# Altium PCB 主板-0909.PcbDoc (part 3 of 5)
Units mm, origin at the board's own origin, x right, y up, seen from the top; angles counter-clockwise.
Board outline 97.69 x 103.45 mm, 2 copper layers (Top Layer, Bottom Layer); 76 components, 70 nets, 245 pads, 271 vias.
Unrouted connection lines stored in the file: 5.
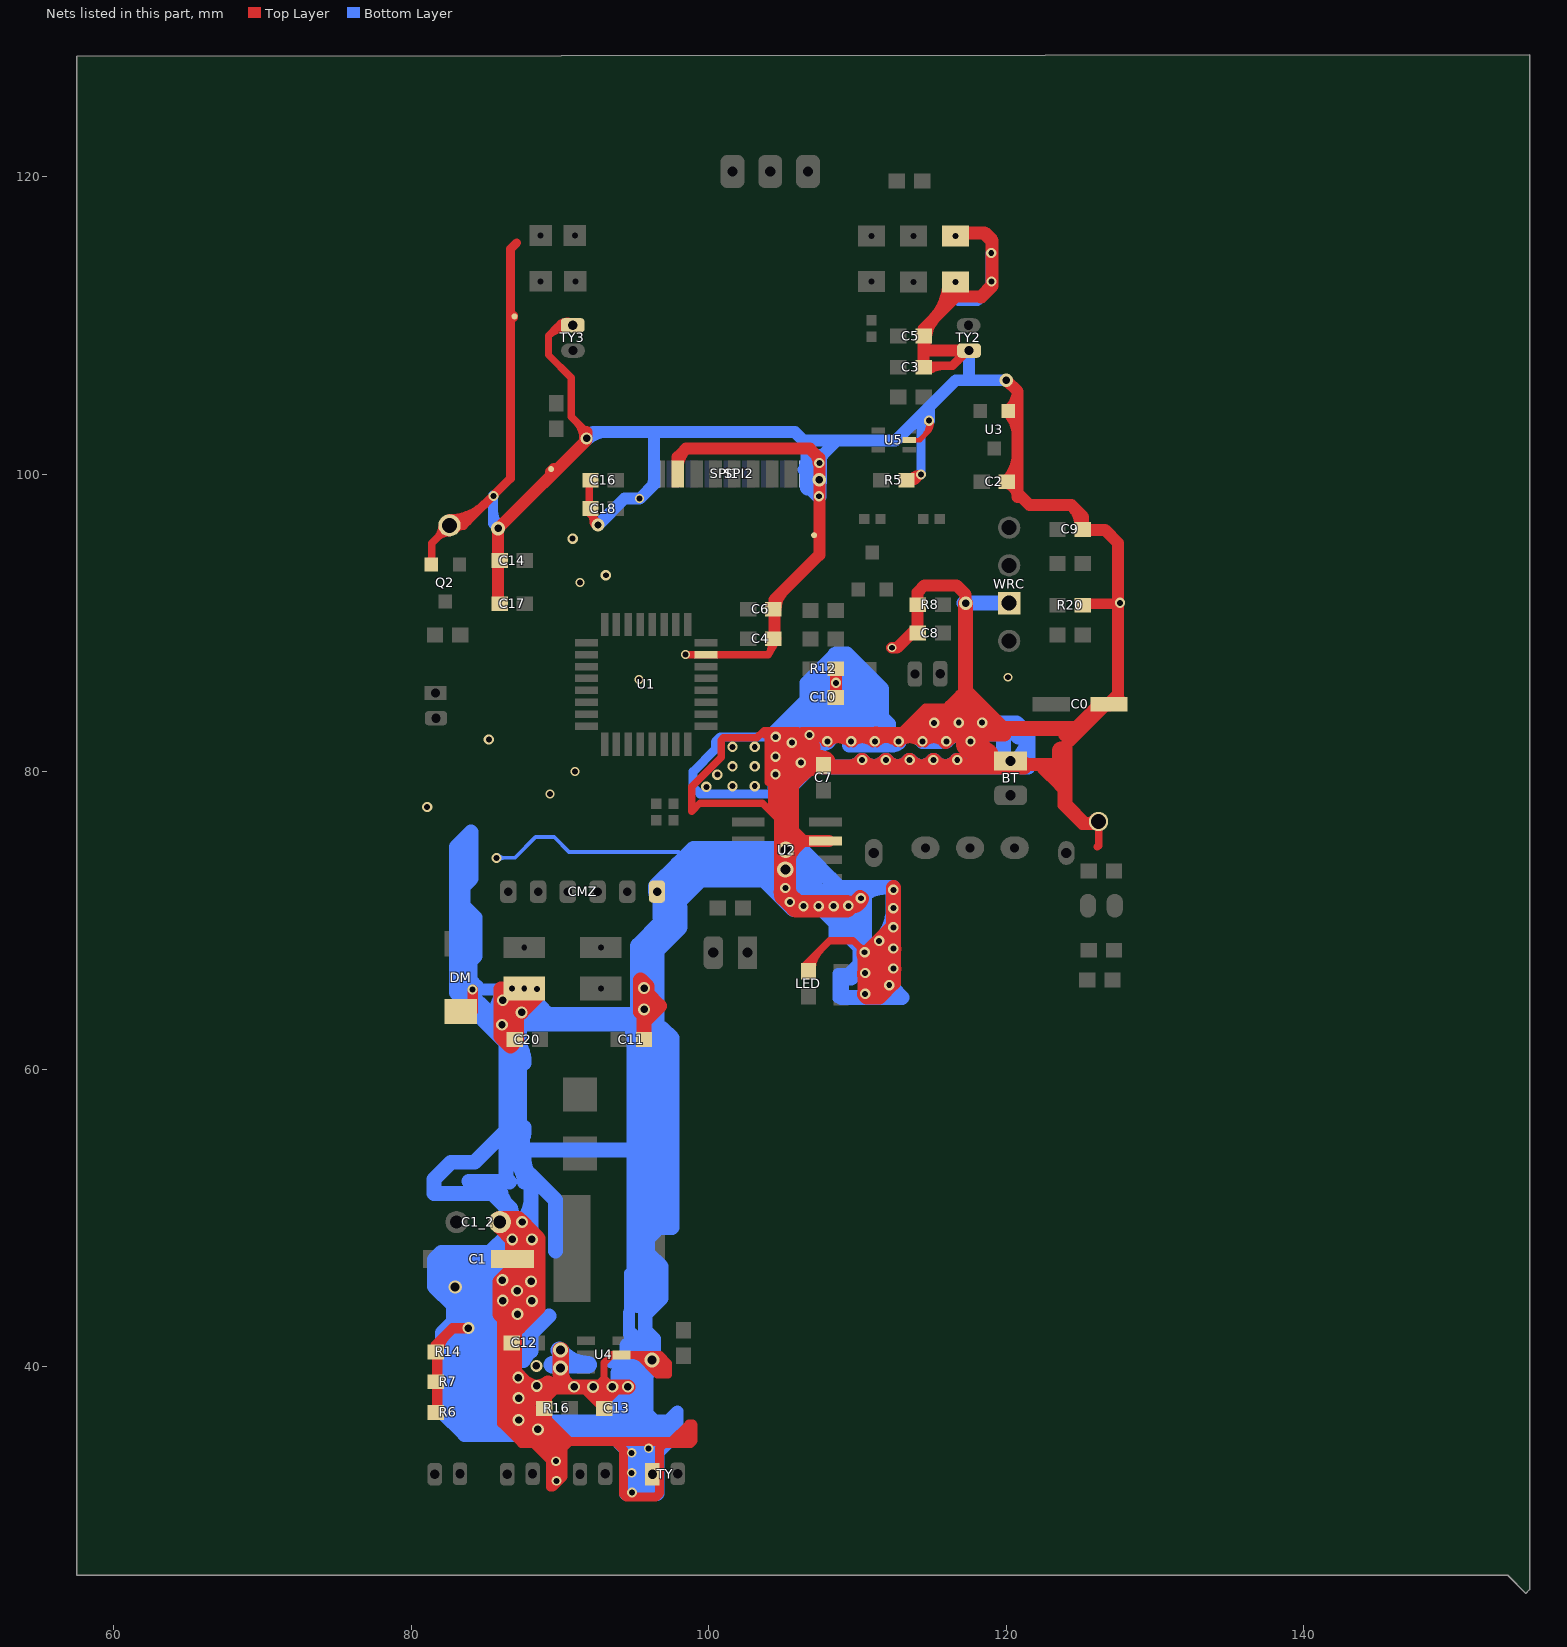
[diagram p3: the nets of this part, all layers, seen from the top]

## Via types
v1: diameter 0.7, hole 0.4, Top Layer to Bottom Layer, 113 vias
v2: diameter 0.68, hole 0.4, Top Layer to Bottom Layer, 89 vias
v3: diameter 0.8, hole 0.5, Top Layer to Bottom Layer, tented both sides, 22 vias
v4: diameter 0.6, hole 0.4, Top Layer to Bottom Layer, 8 vias
v5: diameter 0.9, hole 0.5, Top Layer to Bottom Layer, 8 vias
v6: diameter 0.8, hole 0.5, Top Layer to Bottom Layer, 8 vias
v7: diameter 0.65, hole 0.4, Top Layer to Bottom Layer, tented both sides, 6 vias
v8: diameter 1, hole 0.75, Top Layer to Bottom Layer, tented both sides, 5 vias
v9: diameter 0.8, hole 0.4, Top Layer to Bottom Layer, 2 vias
v10: diameter 1.1, hole 0.68, Top Layer to Bottom Layer, 2 vias
v11: diameter 1, hole 0.56, Top Layer to Bottom Layer, tented both sides, 2 vias
v12: diameter 1, hole 0.6, Top Layer to Bottom Layer, tented both sides, 2 vias
v13: diameter 0.9, hole 0.6, Top Layer to Bottom Layer, tented both sides, 1 vias
v14: diameter 0.95, hole 0.5, Top Layer to Bottom Layer, 1 vias
v15: diameter 0.7, hole 0.4, Top Layer to Bottom Layer, tented bottom, 1 vias
v16: diameter 1, hole 0.6, Top Layer to Bottom Layer, tented bottom, 1 vias

## Nets (pads, with @x,y where several pads share a name; then routed paths per layer and width w, separated by ;. In a path a pad name is that pad's centre, name@x,y a point inside that pad or via, vN(x,y) a via of type N, cw(c..) or ccw(c..) an arc to the next point about the centre after c; other vN are vias at no path point) (continued)
GND: BT.2 C0.2 C1.1 C1_2.1 C2.1 C3.1 C4.2 C5.1 C6.1 C7.1 C8.1 C9.1 C10.2 C11.2 C12.2 C13.2 C14.2 C16.1 C17.2 C18.1 C20.1 CMZ.2 DM.1 LED.1 pad.0@86.944,110.617 pad.0@87.6,65.432 pad.0@89.408,100.355 pad.0@96.33,100.032 pad.0@107.086,95.91 pad.0@116.6,112.932 pad.0@116.6,116.032 pad.4@82.575,96.571 pad.4@126.213,76.657 Q2.2 R5.1 R6.2 R7.1 R8.2 R12.1 R14.1 R16.2 R20.1 SPI1.7 SPI2.8 TY2.2 TY3.2 TY.2 U1.7 U2.3 U3.1 U4.2 U5.2 WRC.2 | length 2248.5
  Top Layer w0.254: C0.2@126.695,84.557 C0.2@126.913,84.546
  Top Layer w0.3: U5.2@113.495,102.3 114.213,102.3 114.808,102.895 v2(114.808,103.607) cw(c113.371,103.54) 114.192,102.359 ; v2@114.674,103.472 cw(c114.349,103.148) 114.808,103.148 cw(c115.267,103.148) v2@114.942,103.472 ; 114.808,102.921 ccw(c114.179,103.445) v2@114.944,103.737
  Top Layer w0.495: v4@98.45,87.877 U1.7@99.825,87.877 104.006,87.877 C4.2@104.523,88.724 ; C4.2@104.086,88.817 cw(c103.434,88.412) 104.089,88.013 ; C4.2@104.419,88.951 C4.2@104.65,88.951 ; C0.2@126.913,84.546 126.924,84.328 C0.2@126.924,84.633
  Top Layer w0.5: Q2.2@81.194,93.782 81.382,93.97 81.382,95.377 pad.4@82.575,96.571 ; Q2.2@81.209,94.116 ccw(c80.791,94.534) 81.382,94.534 ; pad.4@82.075,96.571 cw(c80.868,96.571) 81.722,95.717 cw(c82.575,94.864) pad.4@82.575,96.071 ; v12@89.866,39.676 cw(c89.439,39.249) 90.043,39.249 cw(c90.647,39.249) v12@90.22,39.676 ; 89.987,110.08 cw(c90.496,109.572) TY3.2@90.559,110.288 ; 90.221,38.811 90.221,39.227 90.51,38.938 ; TY3.2@90.36,110.167 cw(c89.826,110.616) 89.826,109.919 ; TY3.2@90.515,109.79 ccw(c90.373,108.181) 89.23,109.323 ; TY3.2@90.855,109.919 89.826,109.919 ; 91.063,103.577 cw(c89.9,102.413) v6@91.546,102.413 ; 91.796,102.845 90.754,103.886 90.754,104.008 90.769,104.023 90.769,106.487 89.23,108.026 89.23,109.323 ; C18.1@91.878,97.604 cw(c91.294,96.876) 92.227,96.876 ccw(c92.702,96.876) v5@92.366,96.54 ; v6@91.992,38.412 v6(92.227,38.647) 92.368,38.647 92.964,39.243 93.523,38.684 93.523,38.649 94.123,38.649 C13.2@92.939,37.465 ; C16.1@92.05,99.6 91.973,99.523 91.973,97.379 92.558,96.795 v5(92.558,96.596) ; 92.95,38.643 92.964,38.643 92.964,40.272 93.496,40.804 96.737,40.804 97.296,40.245 97.296,39.472 96.545,39.472 95.25,40.767 ; U4.2@94.539,40.767 95.25,40.767 ; U4.2@94.59,40.804 cw(c94.59,39.015) v16@95.855,40.28 ; v16@95.941,40.535 cw(c95.829,41.346) 95.25,40.767 ; 103.759,82.499 104.013,82.499 ; 104.242,78.736 cw(c105.592,78.736) v1@104.637,79.691 ; v1@104.242,79.93 cw(c105.592,79.93) v1@104.637,80.885 ; v1@104.315,80.94 cw(c103.978,80.781) 104.242,80.518 ; 104.369,80.366 104.391,80.366 ; v1@104.47,80.727 ccw(c104.524,81.358) 105.072,81.041 ; v1@104.496,80.726 ccw(c104.496,81.78) 105.241,81.035 ; v1@104.574,80.016 cw(c104.787,80.518) 104.242,80.518 ; 104.603,71.917 cw(c105.345,71.772) v1@105.032,72.46 ; 104.626,72.034 cw(c105.177,71.926) v1@105.132,72.486 ; 104.648,72.147 cw(c105.772,72.147) v10@105.286,73.161 ; 104.648,72.252 104.648,76.86 104.47,77.038 ; 104.648,72.689 ccw(c105.658,72.689) v1@104.944,71.975 ; 104.648,72.74 cw(c107.193,72.74) v10@105.394,74.54 ; 104.648,72.942 cw(c105.391,72.942) v10@105.069,73.612 ; 104.648,73.896 ccw(c106.865,73.896) v1@105.297,72.328 ; 104.648,73.947 cw(c105.986,73.947) v10@105.04,74.894 ; 104.648,74.175 ccw(c105.9,74.175) v10@105.015,73.29 ; 104.648,75.382 ccw(c107.107,75.382) v10@105.368,73.644 ; 104.648,75.557 ccw(c105.986,75.557) v10@105.04,74.611 ; 104.648,76.764 ccw(c107.193,76.764) v10@105.394,74.964 ; 104.662,75.279 ccw(c105.689,75.417) v10@105.06,74.593 ; v1@104.696,79.832 cw(c106.282,79.832) 105.16,80.954 ; v1@104.696,81.026 cw(c105.178,81.026) 104.837,81.367 cw(c104.496,81.709) v1@104.496,81.226 ; 104.833,80.627 ccw(c103.495,81.966) 105.388,81.966 cw(c104.66,81.966) 105.175,81.451 ; 104.986,81.517 cw(c105.588,80.915) v1@105.588,81.766 ; 105.009,81.54 cw(c106.782,79.767) v1@106.782,82.274 ; v10@105.255,73.839 cw(c105.721,74.11) v10@105.374,74.523 ; 105.271,81.547 cw(c104.496,82.322) v1@104.496,81.226 ; v1@105.443,81.719 cw(c106.782,80.381) v1@106.782,82.274 ; v1@105.541,81.669 ccw(c105.631,82.237) 106.037,81.831 ; v1(105.588,81.966) 105.379,82.123 105.13,82.372 104.826,82.677 104.928,82.779 ; v1@105.588,82.166 ccw(c105.588,82.894) 106.103,82.379 ; v1@105.619,82.163 ccw(c105.82,83.435) v1@106.731,82.525 ; 105.687,81.481 ccw(c105.202,81.966) v1@105.888,81.966 ; v1@105.788,81.966 cw(c106.639,81.966) 106.037,82.567 ; 105.863,82.393 cw(c106.782,81.474) 106.782,82.774 ccw(c106.782,82.088) 106.296,82.573 ; 106.094,81.888 cw(c104.496,83.487) v1@104.496,81.226 ; 106.188,82.211 cw(c106.542,81.599) v1@106.729,82.281 ; 106.267,82.061 cw(c106.782,81.546) v1@106.782,82.274 ; LED.1@106.45,66.65 cw(c107.182,66.65) 106.664,67.167 ; LED.1@106.45,66.75 106.45,66.953 108.153,68.656 109.703,68.656 v1(110.49,67.869) ; v1@106.582,82.463 ccw(c106.248,82.444) 106.248,82.779 112.981,82.779 ; v1@106.628,82.346 ccw(c106.248,82.032) 106.248,82.525 ; v1@106.889,82.305 cw(c107.172,81.861) 107.308,82.37 ; v1@106.906,82.317 cw(c107.168,81.989) 107.277,82.394 ; LED.1@106.95,66.65 cw(c108.889,66.65) 107.518,68.021 ; 107.387,82.525 ccw(c107.387,81.868) v1@106.923,82.332 ; 107.418,82.537 ccw(c107.418,81.838) v1@106.923,82.332 ; 107.629,82.537 cw(c107.629,81.833) v1@108.232,82.197 ; 107.642,82.525 cw(c107.642,81.83) v1@108.228,82.203 ; v1@107.751,82.242 cw(c108.246,81.801) 108.566,82.38 ; v1@107.752,82.243 cw(c108.237,81.806) 108.547,82.38 ; v1@107.804,81.939 ccw(c106.744,81.299) v1@106.744,82.537 ; v1@107.807,81.935 ccw(c106.731,81.249) v1@106.731,82.525 ; 107.897,82.537 cw(c107.897,80.363) 109.434,81.901 ccw(c107.927,80.394) 107.927,82.525 ; 108,82.779 ccw(c108,81.255) v1@106.923,82.332 ; 108.416,82.525 ccw(c108.416,81.601) 107.763,82.254 cw(c108.447,81.571) 108.447,82.537 ; 109.104,82.537 cw(c109.104,81.571) 109.787,82.254 ccw(c109.134,81.601) 109.134,82.525 ; 109.106,82.078 ccw(c108.723,81.369) 108.124,81.908 cw(c108.725,81.374) 109.114,82.077 ; v1@109.351,82.242 cw(c109.846,81.801) 110.166,82.38 ; v1@109.352,82.243 cw(c109.837,81.806) 110.147,82.38 ; 109.497,82.537 cw(c109.497,80.363) 111.034,81.901 ccw(c109.527,80.394) 109.527,82.525 ; 109.623,82.525 ccw(c109.623,80.394) 108.117,81.901 cw(c109.654,80.363) 109.654,82.537 ; 110.016,82.525 ccw(c110.016,81.601) 109.363,82.254 cw(c110.046,81.572) 110.046,82.537 ; v1@110.29,67.869 ccw(c109.807,67.869) 110.149,68.21 ccw(c110.49,68.552) v1@110.49,68.069 ; 110.704,82.537 cw(c110.704,81.571) 111.387,82.254 ccw(c110.734,81.601) 110.734,82.525 ; 110.706,82.078 ccw(c110.323,81.369) 109.724,81.908 cw(c110.325,81.374) 110.714,82.077 ; v1@110.947,82.237 cw(c111.457,81.801) 111.789,82.384 ; 111.223,82.525 ccw(c111.223,80.394) 109.717,81.901 cw(c111.252,80.368) 111.252,82.537 ; v1@111.327,81.912 cw(c111.926,81.399) 112.316,82.085 ; 111.616,82.525 ccw(c111.616,81.601) 110.963,82.254 cw(c111.647,81.571) 111.647,82.537 ; 112.347,82.537 cw(c112.347,81.671) v1@113.002,82.239 ; 112.364,82.525 cw(c112.364,81.671) v1@112.998,82.243 ; v1@112.527,82.21 cw(c113.143,81.794) 113.143,82.537 ; v1@112.551,82.242 cw(c113.046,81.801) 113.366,82.38 ; v1@112.552,82.243 cw(c113.037,81.806) 113.347,82.38 ; v1@112.563,82.254 cw(c113.216,81.601) 113.216,82.525 ; v1@112.624,81.911 ccw(c111.252,80.721) 111.252,82.537 ; v1@112.627,81.908 ccw(c111.239,80.656) 111.239,82.525 ; 112.697,82.537 cw(c112.697,80.363) 114.234,81.901 ccw(c112.727,80.394) 112.727,82.525 ; 112.823,82.525 ccw(c112.823,80.394) 111.317,81.901 cw(c112.854,80.363) 112.854,82.537 ; v1@112.917,81.901 cw(c114.423,80.394) 114.423,82.525 ; v1@112.924,81.908 cw(c113.523,81.369) 113.906,82.078 ; v1@112.924,81.909 cw(c113.525,81.374) 113.914,82.077 ; v1@112.941,81.93 cw(c114.084,81.158) 114.084,82.537 ; 113.904,82.537 cw(c113.904,81.571) 114.587,82.254 ccw(c113.934,81.601) 113.934,82.525 ; v1@114.151,82.242 cw(c114.646,81.801) 114.966,82.38 ; v1@114.152,82.243 cw(c114.637,81.806) 114.947,82.38 ; v1@114.162,82.253 cw(c114.843,81.58) 114.843,82.537 ; v1@114.163,82.254 cw(c114.816,81.601) 114.816,82.525 ; 114.297,82.537 cw(c114.297,80.363) 115.834,81.901 ccw(c114.327,80.394) 114.327,82.525 ; v1@114.524,81.908 cw(c115.123,81.369) 115.506,82.078 ; v1@114.524,81.909 cw(c115.125,81.374) 115.514,82.077 ; 115.504,82.537 cw(c115.504,81.571) 116.187,82.254 ccw(c115.534,81.601) 115.534,82.525 ; 115.697,84.201 115.189,84.201 115.189,84.023 114.884,83.718 ; v1@115.896,82.226 ccw(c115.685,82.715) 116.218,82.715 ; v1@115.953,82.241 ccw(c115.919,82.537) 116.218,82.537 ; 116.023,82.525 ccw(c116.023,80.394) 114.517,81.901 cw(c116.04,80.397) 116.04,82.537 ; v1@116.15,82.139 cw(c116.434,82.295) 116.205,82.525 ; v1@116.153,82.133 cw(c116.464,82.291) 116.218,82.537 ; 116.416,82.525 ccw(c116.416,81.601) 115.763,82.254 cw(c116.447,81.571) 116.447,82.537 ; 116.459,82.779 117.831,82.779 cw(c117.831,83.649) v1@117.004,83.375 ; v1@116.53,83.218 ccw(c117.138,83.419) 117.138,82.779 ; 117.213,82.537 cw(c117.213,81.753) v1@117.843,82.221 ; 117.228,82.525 cw(c117.228,81.751) v1@117.839,82.226 ; v1@117.442,81.923 ccw(c116.218,81.012) 116.218,82.537 ; v1@117.444,81.919 ccw(c116.205,80.954) 116.205,82.525 ; 117.623,82.525 ccw(c117.623,80.394) 116.117,81.901 cw(c117.654,80.363) 117.654,82.537 ; 118.059,82.525 116.205,82.525 ; 118.059,82.537 116.218,82.537 ; BT.2@120.674,80.605 ccw(c121.347,81.239) BT.2@121.347,80.315 ; BT.2@121.03,80.391 cw(c121.727,79.694) 121.727,80.68 ; BT.2@121.03,80.957 ccw(c121.698,81.625) 121.698,80.68 ; BT.2@121.038,80.948 ccw(c122.504,82.328) 122.504,80.315 ; 124.206,77.648 123.977,77.876 ; 124.206,81.839 124.206,77.876 125.438,76.644 126.428,76.644 pad.4@126.213,76.657 126.213,75.032 126.136,74.955 ; 124.231,82.525 124.117,82.639 ; 125.12,83.033 124.003,81.915 124.003,82.525 124.003,82.753 124.117,82.639 ; 125.247,76.657 ccw(c125.247,77.623) pad.4@125.93,76.94 ; 125.499,84.021 cw(c126.163,83.357) C0.2@126.163,84.296 ; pad.4@125.82,76.736 cw(c125.476,76.805) 125.476,76.454 124.968,76.454 ccw(c124.968,77.639) pad.4@125.899,76.905 ; pad.4@126.263,76.657 126.263,76.352 125.07,76.352 123.698,77.724 123.698,78.156 ; C0.2@126.924,84.633 C0.2@126.913,84.622 ; 89.23,109.323 89.826,109.919 ; 104.013,82.499 104.013,79.299 104.242,79.527 ; 104.013,82.499 104.495,82.499 104.572,82.423 v1(104.496,82.347) 104.47,82.321 104.47,81.712 ; 104.242,77.267 104.47,77.038 ; 104.242,77.267 103.607,77.902 99.416,77.902 98.857,77.343 98.857,78.994 100.838,80.975 100.838,82.135 100.99,82.288 103.243,82.288 103.734,82.779 104.928,82.779 ; 104.242,77.267 104.242,79.527 ; 104.242,79.527 104.242,80.518 ; 104.242,79.527 104.391,79.527 104.391,80.366 ; 104.242,80.518 104.242,80.772 v1@104.391,80.921 ; 104.242,80.518 104.391,80.667 ; 104.391,80.366 104.47,80.366 ; 104.391,80.366 104.391,80.667 ; 104.391,80.667 v1@104.47,80.747 ; 104.391,80.667 v1@104.391,80.921 ; v1@104.391,80.921 104.391,81.632 104.47,81.712 ; v1@104.391,80.921 v1@104.47,81.001 ; 104.47,77.038 104.47,80.366 ; 104.47,80.366 104.572,80.366 v1@106.731,82.525 ; 104.47,80.366 v1@104.47,80.747 ; v1@104.47,80.747 106.248,82.525 ; v1@104.47,80.747 v1@104.47,81.001 ; v1@104.47,81.001 104.47,81.712 ; v1@104.47,81.001 v1(104.496,81.026) 104.496,81.28 105.994,82.779 105.537,82.779 ; 104.47,81.712 105.537,82.779 ; 104.928,82.779 105.537,82.779 ; 106.248,82.525 v1@106.731,82.525 ; v1@106.731,82.525 111.239,82.525 ; v1@106.731,82.525 v1@106.743,82.537 ; v1@106.743,82.537 111.252,82.537 ; 111.239,82.525 112.727,82.525 ; 111.252,82.537 112.74,82.537 ; 112.727,82.525 112.74,82.537 ; 112.727,82.525 116.027,82.525 116.205,82.525 ; 112.74,82.537 112.981,82.779 ; 112.74,82.537 114.592,82.537 116.04,82.537 ; 112.981,82.779 114.554,84.351 116.279,84.351 116.838,84.351 116.894,84.351 116.261,83.718 116.205,83.718 115.646,83.718 114.884,83.718 ; 112.981,82.779 113.538,82.779 ; 113.538,82.779 113.944,82.779 ; 113.538,82.779 114.198,83.439 ; 113.944,82.779 114.706,82.779 114.833,82.779 115.265,82.779 116.218,82.779 116.218,82.715 ; 113.944,82.779 114.884,83.718 ; 114.198,83.439 114.478,83.718 ; 114.198,83.439 113.919,83.439 114.198,83.718 114.478,83.718 ; 114.198,83.439 114.351,83.439 114.63,83.718 ; 114.478,83.718 114.63,83.871 114.783,83.871 114.63,83.718 ; 114.478,83.718 114.63,83.718 ; 114.63,83.718 114.884,83.718 ; 116.04,82.537 116.218,82.537 ; 116.205,82.525 116.218,82.537 ; 116.218,82.537 116.218,82.715 ; 122.504,80.315 121.218,80.315 120.853,80.68 123.485,80.68 123.685,80.48 ; 122.504,80.315 123.52,80.315 123.685,80.48 ; 123.685,80.48 123.698,80.467 ; 123.685,80.48 123.698,80.493 123.698,80.467 ; 123.698,78.156 123.977,77.876 ; 123.698,78.156 123.698,79.121 123.698,80.467 ; 123.698,80.467 123.977,80.188 123.977,77.876 ; 124.117,82.639 126.024,84.546 C0.2@126.837,84.546 ; C0.2@126.837,84.546 C0.2@126.913,84.622 ; C0.2@126.837,84.546 C0.2@126.913,84.546 C0.2@126.913,84.622 ; 104.242,80.458 cw(c104.624,80.458) 104.54,80.831 ccw(c104.624,80.458) 104.242,80.458
  Top Layer w0.6: pad.4@82.271,96.52 pad.4@83.16,96.52 ; pad.4@82.575,96.421 ccw(c82.575,98.328) 83.924,96.979 ; pad.4@82.575,96.571 83.515,96.571 ; pad.4@82.575,97.021 ccw(c82.575,100.376) 84.948,98.004 ; pad.4@82.926,96.289 cw(c83.515,95.815) 83.515,96.571 ; pad.4@82.926,96.853 ccw(c83.515,97.327) 83.515,96.571 ; 86.665,110.184 cw(c87.377,110.184) pad.0@86.873,110.688 ; 86.665,111.05 ccw(c87.377,111.05) pad.0@86.873,110.546 ; 86.689,36.423 86.276,36.836 86.076,37.036 86.076,36.198 87.425,34.849 88.214,34.849 89.357,33.706 89.357,31.902 89.51,31.902 90.221,32.614 90.221,34.543 90.653,34.974 ; 86.69,36.423 v3(87.219,36.423) 87.546,36.423 87.774,36.195 89.475,34.493 89.764,34.493 ; 87.097,115.57 86.665,115.138 86.665,99.72 83.515,96.571 ; v3@87.376,36.195 87.516,36.055 ; 88.033,35.369 87.49,35.369 87.49,35.827 87.744,35.827 ; 88.67,36.195 88.67,36.957 88.951,36.676 90.22,35.407 ; 88.951,35.865 89.764,35.052 89.764,34.493 ; v7@89.56,32.334 89.687,32.334 89.764,32.41 89.764,34.011 ; 89.852,35.052 90.22,34.684 90.22,35.407 ; 96.723,34.849 98.044,34.849 ; R5.1@113.296,99.797 113.524,99.568 113.843,99.568 v2(114.275,100) ccw(c114.275,98.929) R5.1@113.492,99.66 ; C3.1@114.45,107.3 116.382,107.3 117.413,108.331 TY2.2@117.501,108.419 ; C3.1@114.857,107.038 cw(c115.707,105.793) 115.707,107.3 ; 116.718,107.636 ccw(c116.036,108.319) TY2.2@117.001,108.319 ; 87.516,36.055 86.652,36.055 87.511,35.196 88.578,35.196 89.764,34.011 ; 87.516,36.055 87.744,35.827 ; 87.744,35.827 88.117,35.454 88.117,35.642 87.933,35.827 87.744,35.827 ; 89.764,34.011 89.764,34.493 ; 90.22,35.407 90.653,34.974 ; 90.653,34.974 90.659,34.98 93.696,34.98 ; 93.696,34.98 94.259,34.417 94.259,31.445 94.463,31.242 96.444,31.242 96.698,31.496 96.698,34.544 97.134,34.98 ; 93.696,34.98 97.134,34.98 ; 97.134,34.98 97.515,34.98 98.679,36.144 98.908,36.144 98.958,36.093 98.958,35.763 ; 98.044,34.849 98.171,34.976 ; 98.044,34.849 98.171,34.849 ; 98.171,34.849 98.171,34.976 ; 98.171,34.849 98.781,34.849 98.958,35.027 98.958,35.763 ; 98.171,34.976 98.958,35.763
  Top Layer w0.7: R14.1@81.65,41 81.65,41.442 82.804,42.596 v3(83.845,42.596) ; R6.2@81.737,36.932 R14.1@81.737,41.025 ; R14.1@81.85,41 cw(c83.4,41) 82.304,42.096 ; DM.1@83.34,63.885 84.125,63.885 v2(84.125,65.354) ; R20.1@125.15,91.308 v2@127.432,91.308 ; R20.1@125.306,91.094 cw(c125.822,90.578) 125.822,91.308
  Top Layer w0.8: C17.2@85.847,91.465 v14(85.847,96.363) 91.796,102.311 91.796,102.845 ; pad.0@86.629,65.11 cw(c87.343,64.397) pad.0@87.343,65.406 ; 87.071,63.378 88.519,64.825 pad.0@88.519,65.1 ; v3@87.321,39.412 ccw(c88.91,40.667) 88.91,38.643 ; v3@87.352,37.768 cw(c88.91,36.819) 88.91,38.643 ; v3@87.374,37.846 cw(c88.472,37.846) 87.695,38.622 ; v3@87.374,37.849 cw(c88.423,37.866) 87.681,38.608 87.716,38.643 88.91,38.643 ; pad.0@87.6,65.406 87.602,65.406 87.617,65.406 87.617,65.415 87.617,65.431 pad.0@87.617,65.457 ; 88.951,37.838 89.756,38.644 ; 89.306,38.643 89.756,38.644 ; 89.408,100.155 ccw(c89.408,100.715) 89.804,100.319 ; 89.444,99.96 ccw(c89.048,100.355) 89.608,100.355 ; v12@90.14,39.83 ccw(c90.899,39.651) 90.348,39.1 ; v12@90.143,39.853 ccw(c91.465,39.853) 90.53,38.918 ; v6(90.957,38.659) 90.957,38.645 89.756,38.644 ; v6(92.227,38.647) 92.964,38.648 92.989,38.648 v6@93.523,38.649 ; v16@96.124,40.211 cw(c96.189,39.242) 96.876,39.929 ; SPI1.7@97.917,100.032 97.917,101.16 98.484,101.727 106.807,101.727 107.442,101.092 v1(107.442,100.762) v5(107.442,99.644) 107.442,94.59 104.419,91.567 C4.2@104.419,88.951 ; SPI1.7@97.942,100.507 cw(c99.58,100.507) 98.422,101.665 ; C6.1@104.5,90.932 cw(c106.228,90.932) 105.006,92.154 ; v10@105.05,73.537 ccw(c104.403,74.185) 105.318,74.185 ; v10@105.075,74.646 cw(c104.489,74.06) 105.318,74.06 ; v1@105.156,72.104 ccw(c106.317,72.104) v1@105.496,71.282 ; 105.156,76.86 v10@105.156,73.575 ; v10@105.181,72.923 105.181,73.304 v10@105.156,73.33 ; v10@105.186,74.902 ccw(c105.238,76.473) 106.35,75.362 ; v10@105.251,74.885 ccw(c105.533,75.42) 106.017,75.056 ; v10@105.273,73.525 cw(c105.746,73.902) v10@105.318,74.33 ; v10@105.306,73.431 cw(c107.446,73.431) 105.933,74.945 ; v1@105.473,71.295 cw(c105.578,71.704) 105.156,71.704 v1@105.156,71.933 ; 105.588,76.124 106.35,75.362 ; 106.07,75.362 U2.3@108.077,75.362 ; 107.123,101.411 cw(c106.474,100.762) v1@107.392,100.762 ; C10.2@108.55,85 R12.1@108.55,86.932 ; v4(112.319,88.341) 112.674,88.341 114.05,89.717 R8.2@114.05,91.232 ; 114.046,90.092 114.046,92.075 114.503,92.532 116.662,92.532 117.272,91.923 v5(117.272,91.338) ; C3.1@114.45,107.3 114.45,109.776 116.6,111.926 pad.0@116.6,112.932 ; 114.503,108.331 117.413,108.331 TY2.2@117.475,108.331 ; C5.1@114.6,109 cw(c116.836,109) 115.255,110.581 ; 115.036,110.362 ccw(c112.466,112.932) pad.0@116.1,112.932 ; pad.0@116.388,112.72 cw(c115.876,112.208) 116.6,112.208 cw(c117.324,112.208) pad.0@116.812,112.72 ; 116.401,111.728 ccw(c115.197,112.932) pad.0@116.9,112.932 ; 116.756,111.946 118.321,111.946 ; v5(120.015,106.324) 120.766,105.573 ; C2.1@120.029,99.571 ccw(c118.25,101.35) 120.766,101.35 ; C2.1@120.073,99.404 cw(c119.817,98.489) 120.766,98.489 ; U3.1@120.115,104.19 cw(c118.541,102.616) 120.766,102.616 ; U3.1@120.121,104.316 ccw(c119.219,105.573) 120.766,105.573 ; C2.1@120.595,99.005 ccw(c120.181,99.419) 120.766,99.419 ; C9.1@125,96.307 ccw(c122.885,96.443) 124.384,97.942 ; C0.2@126.924,84.633 127.533,85.242 127.533,95.377 126.644,96.266 125.184,96.266 125.184,97.142 124.384,97.942 ; 88.91,38.643 89.078,38.811 89.924,38.811 89.756,38.644 ; v1@105.156,71.933 ccw(c105.946,71.933) 105.49,71.288 cw(c105.946,71.933) v1@105.156,71.933 ; v1@105.156,71.933 v10@105.156,73.33 ; v10@105.156,73.33 105.131,73.483 105.115,73.575 105.131,73.575 v10@105.156,73.575 ; v10@105.156,73.33 v10@105.156,73.575 ; v10@105.156,73.575 105.318,73.575 v10@105.318,74.33 ; v10@105.318,74.33 106.35,75.362 ; 118.165,111.946 ccw(c118.165,112.467) 118.533,112.099 ; 118.165,111.946 ccw(c118.165,112.467) 118.533,112.099 ; 118.165,111.946 ccw(c118.165,112.467) 118.533,112.099 ; 120.766,105.573 120.766,98.74 121.564,97.942 124.384,97.942 ; 127.533,85.1 ccw(c128.217,85.1) 127.734,84.617 cw(c128.217,85.1) 127.533,85.1
  Top Layer w0.9: pad.0@116.865,116.23 118.542,116.23 119.05,115.722 119.05,112.674 118.321,111.946
  Top Layer w1: C1_2.1@85.928,49.987 87.198,49.987 v3(87.452,49.733) 88.036,49.149 88.036,49.124 88.536,48.624 ; C1_2.1@85.95,49.727 85.95,49.407 86.8,48.557 v3@86.8,48.26 ; C1.1@86.04,47.269 86.538,47.269 86.8,47.007 C1.1@86.8,47.235 v3@86.8,48.26 ; v3@86.103,45.863 ccw(c84.869,47.625) C1.1@87.02,47.625 ; v3@86.112,45.775 cw(c85.545,44.413) 87.02,44.413 ; v3@86.121,44.485 ccw(c83.951,46.656) C1.1@87.02,46.656 ; C1_2.1@86.127,49.55 cw(c87.181,48.496) v3@87.181,49.987 ; v3(86.131,45.822) 86.131,44.45 v3(86.157,44.45) ; v3@86.157,44.5 ccw(c86.16,46.023) v3@87.237,44.946 ; v3@86.169,44.498 ccw(c86.393,45.356) v3@87.02,44.729 ; v3@86.207,44.449 ccw(c87.077,44.432) 86.462,43.816 ; 86.233,43.588 86.462,43.816 ; 86.276,36.958 cw(c89.565,36.958) v3@87.239,39.284 ; 86.276,38.782 ccw(c89.632,38.782) 87.259,36.408 ccw(c87.774,36.923) 87.774,36.195 ; 86.276,40.255 ccw(c89.632,40.255) v3@87.259,37.881 ; 86.276,40.432 cw(c87.827,40.432) 86.73,41.529 ccw(c87.746,40.513) 86.309,40.513 ; 86.284,40.97 86.284,43.078 ; C12.2@86.309,41.529 86.309,40.03 86.88,39.505 86.944,39.446 86.944,38.799 ; C1_2.1@86.481,49.482 cw(c86.25,48.686) v3@87.079,48.686 ; 86.614,63.03 ccw(c87.515,63.03) C20.1@86.878,62.392 ; 86.614,63.081 cw(c87.515,63.081) 86.878,63.719 ; 86.614,63.776 cw(c88.656,63.776) pad.0@87.212,65.22 ; 86.614,64.427 ccw(c87.515,64.427) 86.878,63.789 ; pad.0@86.682,64.926 ccw(c86.593,65.712) pad.0@87.211,65.219 ; 86.718,49.987 cw(c86.718,48.999) v3@87.417,49.698 ; 86.722,45.525 ccw(c88.445,45.987) 87.553,44.443 ; C1.1@86.729,47.165 cw(c86.026,46.462) 87.02,46.462 ; 86.741,42.748 85.95,43.539 85.95,45.716 86.8,46.566 v3@86.8,48.26 ; 86.786,64.418 ccw(c87.557,64.211) 86.885,63.781 ; pad.0@86.796,65.147 cw(c86.186,64.81) 86.856,64.617 ; 86.843,36.195 86.652,36.386 ; 86.944,38.738 cw(c87.594,38.738) v3@87.232,39.278 ; v3@86.944,39.497 86.944,43.663 v3@86.294,44.313 ; 86.944,42.868 cw(c89.059,42.868) 87.564,44.364 ccw(c88.352,43.575) v3@87.237,43.575 ; v3@86.944,43.459 cw(c87.908,43.459) 87.547,44.353 ; v3@86.979,48.615 cw(c85.599,47.235) C1.1@87.55,47.235 ; 87.02,44.291 cw(c88.486,44.291) v3@88.076,45.697 ; 87.02,45.746 ccw(c88.876,45.746) 87.564,44.435 ; 87.071,63.378 87.071,61.951 86.677,61.557 86.03,62.205 86.03,65.406 87.6,65.406 pad.0@87.6,65.432 ; v3@87.174,37.841 cw(c85.372,37.666) 86.652,36.386 ; v3@87.176,37.861 ccw(c86.283,38.138) 86.944,38.799 ; v3@87.184,37.876 ccw(c86.742,38.215) 87.136,38.608 ; v3(87.219,36.423) cw(c87.107,37.593) 86.276,36.762 ; v3(87.224,37.896) ccw(c87.224,40.163) 88.827,38.56 ; v3@87.236,39.357 cw(c89.007,41.437) 86.276,41.437 86.276,36.836 86.276,36.762 ; v3@87.247,39.345 ccw(c88.55,40.129) 88.55,38.608 ccw(c88.55,37.169) v3@87.268,37.823 ; v3@87.266,36.347 cw(c88.42,35.645) 88.101,36.957 ; v3@87.274,36.373 cw(c88.805,36.373) 87.722,37.455 ; v3@87.376,36.195 87.774,36.195 ; v3@87.423,49.693 cw(c86.56,48.495) v3@88.036,48.495 ; v3(87.427,63.83) pad.0@87.427,65.329 ; 87.493,44.435 ccw(c84.976,46.952) 88.536,46.952 ; 87.503,44.276 cw(c89.532,44.276) 88.097,45.71 ccw(c89.104,44.703) 87.68,44.703 ; C1.1@87.503,46.639 cw(c88.246,46.639) C1.1@87.721,47.165 ; C1.1@87.503,46.972 cw(c89.705,46.972) v3@88.148,48.529 ; C1.1@87.503,47.215 ccw(c89.532,47.215) v3@88.097,45.781 ; 87.57,44.428 cw(c88.174,44.845) 87.655,45.364 v3@87.503,45.212 ; C1.1@87.569,47.294 ccw(c87.066,47.653) 87.503,48.09 ; 87.571,44.426 cw(c88.218,44.826) 87.68,45.364 ; 87.578,44.404 cw(c89.247,44.56) v3(88.062,45.745) 87.68,45.364 ; C1.1@87.579,47.165 cw(c85.27,44.856) 88.536,44.856 ; pad.0@87.612,65.41 87.617,65.406 pad.0@87.72,65.302 ; C1.1@87.617,47.33 ccw(c87.164,48.624) 88.536,48.624 ; v3@87.668,49.517 cw(c86.715,48.565) v3@88.063,48.565 ; C1.1@87.743,47.271 cw(c88.948,47.73) v3@88.036,48.641 ; C1.1@87.889,46.639 cw(c86.887,46.048) v3@88.013,45.758 ; v3@88.026,45.71 cw(c86.797,44.481) 88.536,44.481 ; v3@88.026,45.781 ccw(c86.797,47.01) 88.536,47.01 ; v3@88.032,45.705 cw(c87.251,44.668) 88.536,44.85 ; v3@88.036,48.889 v3@88.036,48.641 ; v3@88.077,48.529 cw(c86.971,47.423) 88.536,47.423 ; v3@88.087,45.789 cw(c89.134,47.625) C1.1@87.02,47.625 ; v3@88.089,48.609 cw(c87.568,49.561) 86.8,48.793 87.494,48.099 ; v3@88.12,48.614 cw(c88.223,49.327) 87.503,49.327 87.503,48.108 ; 88.235,37.969 ccw(c87.596,38.608) v3@88.5,38.608 ; v3@88.55,38.658 ccw(c88.55,39.562) 89.189,38.923 ; 88.91,38.643 88.875,38.608 ; 88.951,37.838 88.951,36.676 88.951,36.195 88.67,36.195 87.774,36.195 ; 89,38.649 v6@94.564,38.65 ; 89.306,38.608 88.875,38.608 ; 90.043,39.1 v12(90.043,41.123) ; v6(92.227,38.647) 90.957,38.647 91.757,38.647 92.98,37.424 C13.2@92.98,37.2 ; C13.2@92.989,37.2 92.989,38.71 ; C11.2@95.65,62 95.65,63.633 95.428,63.856 95.428,66.015 95.86,65.583 95.86,65.075 96.685,64.249 95.86,63.424 ; 105.588,76.124 105.588,79.121 106.782,80.315 ; 105.654,79.187 ccw(c104.222,80.62) v1@106.247,80.62 ; v1@106.161,80.586 ccw(c106.782,81.162) 106.782,80.315 ; v1@106.162,80.584 ccw(c106.813,81.235) 106.813,80.315 ; 106.268,79.801 cw(c107.723,78.345) 107.723,80.404 ccw(c107.306,79.79) 106.782,80.315 ; 109.267,80.315 ccw(c109.267,81.842) v1@110.347,80.762 ; v1@110.185,71.552 v1@109.601,70.968 ; v1@110.276,71.471 cw(c109.271,72.223) 109.271,70.968 v1@109.601,70.968 ; v1@110.276,80.762 ccw(c111.356,81.842) 111.356,80.315 ; v1@110.284,71.488 cw(c109.601,71.676) v1@109.601,70.968 ; v1@110.44,67.869 ccw(c111.362,67.869) 110.71,67.217 ; v1@110.465,66.472 ccw(c111.203,66.472) 110.681,65.95 ; v1@110.479,65.109 cw(c112.116,63.554) v1@112.116,65.811 ; v1@110.48,65.039 ccw(c110.947,65.506) 110.947,64.846 ; v1@110.48,66.436 ccw(c111.989,67.945) v1@111.989,65.811 ; v1@110.502,66.52 cw(c110.836,65.294) 111.735,66.192 ; v1@110.553,65.042 ccw(c109.97,65.559) 110.521,66.11 110.896,65.735 110.973,65.811 v1@112.116,65.811 ; v1@110.555,66.441 ccw(c109.955,66.902) 110.49,67.437 ; 110.867,80.315 ccw(c110.867,81.842) v1@111.947,80.762 ; v1@110.96,82.245 111.239,82.525 111.252,82.537 ; v1@111.491,68.666 cw(c110.901,68.077) 111.735,68.077 ; v1@111.505,68.626 cw(c110.668,68.71) v1@110.668,67.869 ; 111.633,67.869 v1@110.668,67.869 ; 111.735,65.859 cw(c112.765,65.859) v1@112.403,66.823 ; 111.735,66.519 ccw(c113.001,66.519) v1@112.106,65.624 ; 111.735,66.588 cw(c113.955,66.588) v1@112.385,68.158 ; 111.735,68.312 ccw(c113.955,68.312) v1@112.385,66.741 ; v1@111.735,68.758 111.735,66.531 ; v1@111.876,80.762 ccw(c112.956,81.842) 112.956,80.315 ; v1@112.124,65.612 cw(c112.325,66.167) 111.735,66.167 111.735,66.192 ; v1@112.166,65.761 v1@112.116,65.811 ; v1@112.176,65.624 ccw(c111.587,66.213) 112.42,66.213 ; v1@112.344,66.531 111.735,66.531 ; v1@112.42,72.212 v1(112.42,70.841) v1@112.42,69.621 ; 112.467,80.315 ccw(c112.467,81.842) v1@113.547,80.762 ; v1@113.476,80.762 ccw(c114.556,81.842) 114.556,80.315 ; 114.067,80.315 ccw(c114.067,81.842) v1@115.147,80.762 ; 114.592,82.537 114.833,82.779 ; 114.706,82.779 115.646,83.718 116.279,84.351 116.98,85.052 117.17,84.861 117.17,84.684 ; v1@115.076,80.762 ccw(c116.156,81.842) 116.156,80.315 ; 115.667,80.315 ccw(c115.667,81.842) v1@116.747,80.762 ; 116.027,82.525 116.04,82.537 116.218,82.715 v1(116.815,83.312) ; v1@116.676,80.762 ccw(c117.756,81.842) 117.756,80.315 ; v1@116.766,83.301 cw(c118.231,83.623) 117.17,84.684 ; v1@116.779,83.277 ccw(c117.859,84.356) 117.859,82.829 ; v1@116.818,83.362 ccw(c116.684,81.36) 115.265,82.779 116.205,83.718 116.838,84.351 117.17,84.684 ; v1@116.844,83.352 cw(c116.379,82.713) 117.17,82.713 ; v1@116.85,83.277 ccw(c116.077,84.05) 117.17,84.05 ; 117.17,82.964 ccw(c118.524,82.964) v1@117.567,82.007 ; v5(117.272,91.338) 117.272,85.42 119.786,82.906 124.765,82.906 125.755,83.896 ; v1@117.555,82.059 cw(c118.643,81.675) 118.643,82.829 ; v1@117.571,82.003 cw(c118.223,82.829) 117.17,82.829 ; v1(117.602,82.042) 118.059,82.499 ; 118.618,80.315 ccw(c118.618,81.903) BT.2@119.741,80.78 ; 118.681,82.537 119.875,82.537 ; BT.2@121.218,80.315 106.782,80.315 ; 122.504,80.315 123.698,79.121 123.952,79.121 ; 124.003,82.525 124.231,82.525 ; 124.206,82.144 126.608,84.546 C0.2@126.913,84.546 ; 125.848,83.786 ccw(c125.088,84.546) C0.2@126.163,84.546 ; v3@86.157,44.313 v3@86.294,44.313 ; v3@86.157,44.313 86.157,44.121 86.462,43.816 ; v3@86.157,44.313 v3(86.157,44.45) ; v3(86.157,44.45) v3@86.294,44.313 ; 86.276,36.762 86.652,36.386 ; v3@86.294,44.313 87.237,44.313 ; 86.652,36.386 86.689,36.423 88.875,38.608 ; 86.944,38.799 87.136,38.608 ; v3@87.02,44.729 v3@87.237,44.946 ; v3@87.02,44.729 C1.1@87.02,47.625 ; C1.1@87.02,47.625 87.494,48.099 ; 87.136,38.608 87.681,38.608 88.875,38.608 ; 87.237,44.313 87.493,44.313 87.503,44.323 ; 87.237,44.313 v3@87.237,44.946 ; 87.237,44.313 87.237,42.66 88.536,43.959 88.536,48.624 ; v3@87.237,44.946 v3@87.503,45.212 ; v3@87.259,37.881 cw(c88.019,38.641) 86.944,38.641 ccw(c88.019,38.641) v3@87.259,37.881 ; 87.494,48.099 cw(c87.047,47.652) 87.568,47.292 ccw(c87.047,47.652) 87.494,48.099 ; 87.494,48.099 87.503,48.09 ; 87.494,48.099 87.503,48.108 ; 87.503,44.323 87.68,44.5 87.68,45.364 ; 87.503,44.323 v3@87.503,45.212 ; v3@87.503,45.212 87.503,48.09 ; C1.1@87.503,47.831 ccw(c88.246,47.831) C1.1@87.721,47.306 ; C1.1@87.503,47.831 ccw(c88.246,47.831) C1.1@87.721,47.306 ; C1.1@87.503,47.831 ccw(c88.246,47.831) C1.1@87.721,47.306 ; C1.1@87.503,47.831 ccw(c88.246,47.831) C1.1@87.721,47.306 ; C1.1@87.503,47.831 ccw(c88.246,47.831) C1.1@87.721,47.306 ; 87.503,48.09 87.503,48.108 ; 87.503,48.108 v3@88.036,48.641 ; pad.0@87.6,65.432 87.617,65.431 87.845,65.427 pad.0@87.723,65.305 ; pad.0@87.6,65.432 87.617,65.415 pad.0@87.723,65.305 ; pad.0@87.6,65.432 87.602,65.406 87.617,65.199 pad.0@87.72,65.302 ; pad.0@87.72,65.302 87.96,65.062 pad.0@87.723,65.305 ; pad.0@87.72,65.302 pad.0@87.723,65.305 ; v3@88.12,48.515 ccw(c88.223,47.803) 87.503,47.803 cw(c88.223,47.803) v3@88.12,48.515 ; v3@88.12,48.515 ccw(c88.235,47.792) 87.503,47.792 cw(c88.235,47.792) v3@88.12,48.515 ; 105.308,79.198 ccw(c105.308,80.058) 105.917,79.45 ; 105.308,79.198 ccw(c105.308,80.058) 105.917,79.45 ; 105.308,79.198 ccw(c105.308,80.058) 105.917,79.45 ; 105.321,79.2 ccw(c105.061,80.171) 105.932,79.668 ; 105.321,79.2 ccw(c105.061,80.171) 105.932,79.668 ; 105.321,79.2 ccw(c105.061,80.171) 105.932,79.668 ; 105.321,79.2 ccw(c105.061,80.171) 105.932,79.668 ; 105.321,79.2 ccw(c105.061,80.171) 105.932,79.668 ; 105.321,79.2 ccw(c105.061,80.171) 105.932,79.668 ; 105.344,79.283 cw(c104.755,78.694) 105.588,78.694 ; 105.344,79.283 cw(c104.755,78.694) 105.588,78.694 ; 105.344,79.283 cw(c104.755,78.694) 105.588,78.694 ; v1@110.49,66.531 111.396,66.531 ; v1@110.49,66.531 110.49,64.999 110.642,64.846 111.455,64.846 v1@112.42,65.811 ; v1@110.49,66.531 110.49,67.437 ; 110.49,67.437 111.396,66.531 ; 110.49,67.437 v1(110.49,67.869) v1@110.668,67.869 ; v1@110.668,67.869 v1@112.42,69.621 ; 111.396,66.531 111.735,66.192 ; 111.396,66.531 111.735,66.531 ; 111.735,66.192 ccw(c112.362,66.192) 112.122,65.613 cw(c112.362,66.192) 111.735,66.192 ; 111.735,66.192 111.735,66.531 ; 111.735,66.192 v1@112.116,65.811 ; 111.948,66.531 ccw(c111.948,67.249) v1@112.456,66.741 ; 111.948,66.531 ccw(c111.948,67.249) v1@112.456,66.741 ; 111.948,66.531 ccw(c111.948,67.249) v1@112.456,66.741 ; v1@112.116,65.811 v1@112.42,65.811 ; v1@112.42,65.811 v1(112.42,66.777) v1(112.42,68.123) v1(112.42,69.545) v1@112.42,69.621 ; v1@115.925,82.042 cw(c116.844,82.042) 116.194,82.692 ; v1@115.925,82.042 cw(c116.844,82.042) 116.194,82.692 ; v1@115.925,82.042 cw(c116.844,82.042) 116.194,82.692 ; 117.17,82.829 117.17,83.795 ; 117.17,82.829 118.643,82.829 ; 117.17,83.795 cw(c116.586,83.795) 116.836,83.267 ccw(c116.586,83.795) 117.17,83.795 ; 117.17,83.795 117.17,84.684 ; 117.17,83.795 117.78,84.404 117.78,83.337 118.529,83.337 118.643,83.223 118.643,82.829 ; 87.503,44.973 cw(c88.247,44.973) 88.073,45.697 ccw(c88.247,44.973) 87.503,44.973 ; 111.735,65.876 cw(c112.741,65.876) 112.404,66.824 ccw(c112.741,65.876) 111.735,65.876 ; 111.735,66.048 cw(c112.52,66.048) 112.414,66.826 ccw(c112.52,66.048) 111.735,66.048 ; 111.928,67.869 ccw(c111.928,68.615) 112.456,68.087 cw(c111.928,68.615) 111.928,67.869
  Top Layer w1.1: v12@90.043,39.472 v12(90.043,41.123)
  Top Layer w1.2: 123.698,80.493 123.698,81.432
  Top Layer w1.5: v1@104.708,80.044 cw(c103.687,79.023) 105.131,79.023 ; 105.156,71.704 105.893,70.968 v1@109.271,70.968 ; v1@105.156,71.933 105.131,71.958 105.131,73.483 105.131,73.575 105.131,79.959 ; v1@105.887,81.987 cw(c103.289,81.801) 105.131,79.959 ; 106.782,81.61 105.131,79.959 ; C7.1@107.793,80.644 ccw(c107.041,78.049) 105.131,79.959 ; v1@117.365,81.858 ccw(c118.285,82.571) 118.285,81.407 118.407,81.407 ; v1@117.389,81.831 ccw(c118.407,82.842) 118.407,81.407 ; 118.75,81.153 118.407,81.407
  Bottom Layer w0.254: v2@85.725,74.168 v2(85.725,74.219) 86.97,74.219 88.367,75.616 89.611,75.616 90.617,74.61 97.98,74.61 97.98,73.749 ; v2@85.876,74.068 cw(c86.239,73.705) 86.239,74.219 cw(c86.239,74.733) v2@85.876,74.369
  Bottom Layer w0.4: SPI2.8@106.375,100.223 106.375,102.273 ; 106.375,101.327 ccw(c107.31,101.327) SPI2.8@106.649,100.666
  Bottom Layer w0.6: 94.615,41.395 94.615,46.304 ; v1(104.496,82.347) 100.787,82.347 100.457,82.017 100.457,81.509 98.958,80.01 98.958,78.969 99.416,78.511 105.232,78.511 ; 108.344,70.015 108.344,68.821 109.537,68.821 109.957,68.402 109.957,66.523 108.687,66.523 108.61,66.446 108.61,64.745 108.864,64.745 ; v2(114.275,100) 114.275,103.073 v2(114.808,103.607)
  Bottom Layer w0.7: 85.496,97.512 ccw(c86.996,97.512) v14@85.936,96.451 ; v2(85.522,98.552) 85.52,98.554 85.496,98.53 85.496,96.714 v14(85.847,96.363) ; pad.0@86.665,65.075 cw(c87.175,64.749) pad.0@87.175,65.354
  Bottom Layer w0.8: 83.671,65.354 pad.0@87.621,65.354 ; 84.009,65.724 83.541,66.192 83.541,68.863 ; 84.033,65.684 84.072,65.724 84.072,67.103 ; 84.072,67.384 84.072,68.331 ; 86.614,63.833 86.711,63.833 ; 86.949,63.648 cw(c87.394,63.202) v3@87.394,63.833 ; 87.274,63.269 86.711,63.833 ; 87.6,62.944 90.38,62.944 cw(c90.38,65.29) 88.511,63.87 ; pad.0@87.602,65.43 ccw(c88.519,66.348) pad.0@88.519,65.05 ; v3@87.617,63.817 87.602,63.833 86.711,63.833 ; 87.875,63.386 ccw(c88.767,64.064) 88.767,62.944 ; 88.242,63.786 ccw(c86.045,63.877) pad.0@87.6,65.432 ; pad.0@88.287,65.194 88.049,65.432 pad.0@87.6,65.432 ; pad.0@88.469,65.1 ccw(c89.766,65.1) 88.849,64.183 ; 88.889,64.143 cw(c88.521,63.774) 89.041,63.752 ; 89.484,63.5 89.84,63.144 ; v6(91.796,102.413) 92.227,102.845 96.33,102.845 ; v6@91.866,102.342 cw(c93.079,101.129) 93.079,102.845 ; v5(92.558,96.596) 94.336,98.374 v4(95.352,98.374) 96.33,99.353 pad.0@96.33,100.032 96.33,102.845 ; 94.64,42.164 94.64,43.637 ; 95.152,63.805 89.227,63.805 pad.0@87.6,65.432 ; v3@95.555,63.805 96.418,63.805 ; 95.656,66.345 95.656,66.712 ; pad.0@96.143,99.166 ccw(c95.752,99.557) pad.0@96.305,99.557 ; 96.314,33.881 96.52,34.087 97.892,35.458 97.892,37.008 97.18,36.297 ; SPI2.8@106.38,100.307 cw(c107.202,99.743) v1@107.431,100.713 ; SPI2.8@106.472,100.524 ccw(c105.603,101.394) 106.832,101.394 ; SPI2.8@106.473,100.526 ccw(c105.772,101.321) 106.832,101.321 ; SPI2.8@106.515,100.504 cw(c107.442,100.386) 107.442,101.321 106.832,101.321 ; v1@107.392,100.762 ccw(c106.832,100.761) 106.832,101.321 ; v5@107.417,99.593 v1@107.417,100.533 ; v1@107.425,70.931 cw(c107.896,70.431) 108.382,70.917 108.179,71.12 v1@108.153,71.145 ; v1@107.442,101.092 108.623,102.273 106.375,102.273 ; v1@107.464,100.807 cw(c107.954,101.816) 106.832,101.816 ; v1@107.492,100.762 cw(c108.41,100.762) 107.761,101.411 ; 108.648,102.273 112.56,102.273 114.808,104.521 ; 113.349,103.062 cw(c114.808,101.604) v2@114.808,103.667 ; v2@114.762,103.568 cw(c115.31,104.019) 114.808,104.521 ; v2(114.808,103.607) 114.808,104.521 ; pad.0@116.6,112.932 116.6,111.924 116.815,111.709 118.059,111.709 118.999,112.649 v2(118.999,114.884) ; TY2.2@117.501,108.319 117.501,106.35 117.475,106.324 ; v5(120.015,106.324) 117.475,106.324 ; 83.541,68.863 83.541,69.85 84.072,69.318 ; 83.541,68.863 83.033,69.371 84.072,70.411 84.072,69.318 ; 83.541,68.863 84.072,68.331 ; 84.072,68.331 84.072,69.318 ; 96.33,102.845 105.804,102.845 106.375,102.273 ; 106.375,102.273 106.832,101.816 ; 106.832,101.321 106.832,101.816 ; 114.808,104.521 116.611,106.324 117.475,106.324
  Bottom Layer w0.9: 82.855,42.726 83.976,42.726 84.099,42.603 84.404,42.298 ; v3@83.845,42.496 cw(c83.845,41.625) 84.461,42.241 ; 86.652,36.386 87.046,36.779 87.046,39.656 85.656,41.046 85.271,41.431 85.014,41.688 84.712,41.99 84.7,42.002 84.404,42.298 ; 86.907,39.796 cw(c86.43,39.319) v3@87.104,39.319 ; 87.046,37.043 ccw(c87.894,37.043) v3@87.294,36.444 ; 87.046,37.175 cw(c87.894,37.175) v3@87.294,37.775 ; 87.046,38.517 ccw(c87.894,38.517) v3@87.294,37.917 ; 87.046,38.696 cw(c87.827,38.696) v3@87.275,39.248 ; 93.484,40.322 93.841,40.322 ; 93.841,39.599 93.841,37.009 94.742,36.108 ; 84.404,42.298 ccw(c83.918,41.812) 83.855,42.496 cw(c83.918,41.812) 84.404,42.298